# EAGLE board Air Quality Monitoring (EAGLE 9.7.0)

Size 276.68 x 146.58 mm. Coordinates in mm from the lower left corner, seen from the top.
Outline: 0,0 276.68,0 276.68,146.58 0,146.58 0,0
Copper layers (1*16): Top 0.035mm / dielectric 1.5mm / Bottom 0.035mm
Design rules "default": minimum track width 6mil, minimum drill 0.35mm, track to track 6mil, track to pad 6mil, pad to pad 6mil, via to via 6mil, smd to smd 6mil, copper to edge 40mil, drill to drill 6mil, minimum pad ring 10mil, minimum via ring 8mil, stop-mask expansion 4mil, vias tented up to drill 0mil, thermal gap 10mil

## Footprints (pad centres in the part's own frame; a part is rotated, then mirrored left to right if it is on the bottom)
MQ-XX-SOCKET = drill 1.27: 1 -6.223,6.223; 2 -8.788,0; 3 -6.223,-6.223; 4 6.223,-6.223; 5 8.788,0; 6 6.223,6.223
RESAD1016W63L850D250B = drill 0.83 pad 1.43: 1 -5.08,0; 2 5.08,0
HA-06-SM065 = drill 1 pad 1.676: 1 -2.54,-2.54; 2 0,2.54; 3 2.54,-2.54
ARDUINO-UNO-R3-SHIELD = drill 1.016 pad 1.88: 3.3V 24.13,-2.54; 5V 24.13,0; A0 24.13,12.7; A1 24.13,15.24; A2 24.13,17.78; A3 24.13,20.32; A4 24.13,22.86; A5 24.13,25.4; AREF -24.13,-13.97; D2 -24.13,20.32; D3 -24.13,17.78; D4 -24.13,15.24; D5 -24.13,12.7; D6 -24.13,10.16; D7 -24.13,7.62; D8 -24.13,3.81; D9 -24.13,1.27; D10 -24.13,-1.27; D11 -24.13,-3.81; D12 -24.13,-6.35; D13 -24.13,-8.89; GND@0 24.13,2.54; GND@1 24.13,5.08; GND@2 -24.13,-11.43; IOREF 24.13,-7.62; NC 24.13,-10.16; RES 24.13,-5.08; RX -24.13,25.4; SCL -24.13,-19.05; SDA -24.13,-16.51; TX -24.13,22.86; VIN 24.13,7.62
JHD-162A = drill 1.016 long: 1 -19.05,0; 2 -16.51,0; 3 -13.97,0; 4 -11.43,0; 5 -8.89,0; 6 -6.35,0; 7 -3.81,0; 8 -1.27,0; 9 1.27,0; 10 3.81,0; 11 6.35,0; 12 8.89,0; 13 11.43,0; 14 13.97,0; 15 16.51,0; 16 19.05,0
1X08 = drill 1.016 long: 1 -8.89,0; 2 -6.35,0; 3 -3.81,0; 4 -1.27,0; 5 1.27,0; 6 3.81,0; 7 6.35,0; 8 8.89,0

## Placement (x,y rotation side)
GAS2  GAS-SENSORMQ-XX-SOCKET  [MQ-XX-SOCKET]  218.11,58.24 270 top
R1  220  [RESAD1016W63L850D250B]  151.47,116.44 270 top
R2  20k  [RESAD1016W63L850D250B]  164.17,118.98 270 top
R4  1k  [RESAD1016W63L850D250B]  239.77,111.66 0 top
R6  220  [RESAD1016W63L850D250B]  257.55,114.2 0 top
R7  220  [RESAD1016W63L850D250B]  267.71,111.66 0 top
RPOT2  250k  [HA-06-SM065]  110.83,91.04 0 top
U1  ARDUINO-UNO-R3-SHIELD  [ARDUINO-UNO-R3-SHIELD]  47.88,101.33 270 top
U2  LCD-16X2JHD-162A  [JHD-162A]  133.37,36.63 0 top
U3  PINHD-1X08_1X08M  [1X08]  212.99,140.31 0 top

## Library data of the parts
GAS2 R1 R2 R4 R6 R7 RPOT2 U1-U3 = Tinkercad

## Nets
GAS2_B: GAS2.4 GAS2.6 R2.2
R4_1: R4.1 U3.1
R6_2: R6.2 R7.1 U3.8
U1_3.3V: R4.2 U1.3.3V U3.5
U1_5V: GAS2.1 GAS2.2 GAS2.3 R1.1 RPOT2.1 U1.5V U2.2
U1_D3: U1.D3 U2.14
U1_D4: U1.D4 U2.13
U1_D5: U1.D5 U2.12
U1_D6: U1.D6 U2.11
U1_D8: U1.D8 U3.3
U1_D9: R6.1 U1.D9
U1_D12: U1.D12 U2.6
U1_D13: U1.D13 U2.4
U1_GND: GAS2.5 R2.1 R7.2 RPOT2.3 U1.GND@0 U1.GND@1 U1.GND@2 U2.1 U2.5 U2.16 U3.2
U2_LED+: R1.2 U2.15
U2_VO: RPOT2.2 U2.3

## Tracks (layer width: path | path; a pad name or v marks a point on that pad's centre or on a via)
GAS2_B  (2 unrouted)
R4_1  (1 unrouted)
R6_2  (2 unrouted)
U1_3.3V  (2 unrouted)
U1_5V  (6 unrouted)
U1_D3  (1 unrouted)
U1_D4  (1 unrouted)
U1_D5  (1 unrouted)
U1_D6  (1 unrouted)
U1_D8  (1 unrouted)
U1_D9  (1 unrouted)
U1_D12  (1 unrouted)
U1_D13  (1 unrouted)
U1_GND  (10 unrouted)
U2_LED+  (1 unrouted)
U2_VO  (1 unrouted)